# Altium PCB PlacaTestingChipNoviembre.PcbDoc
Units mil, origin at the board's own origin, x right, y up, seen from the top; angles counter-clockwise.
Board outline 3593.99 x 4655.7 mil, 2 copper layers (Top Layer, Bottom Layer); 18 components, 28 nets, 85 pads, 1 vias.
Unrouted connection lines stored in the file: 1.
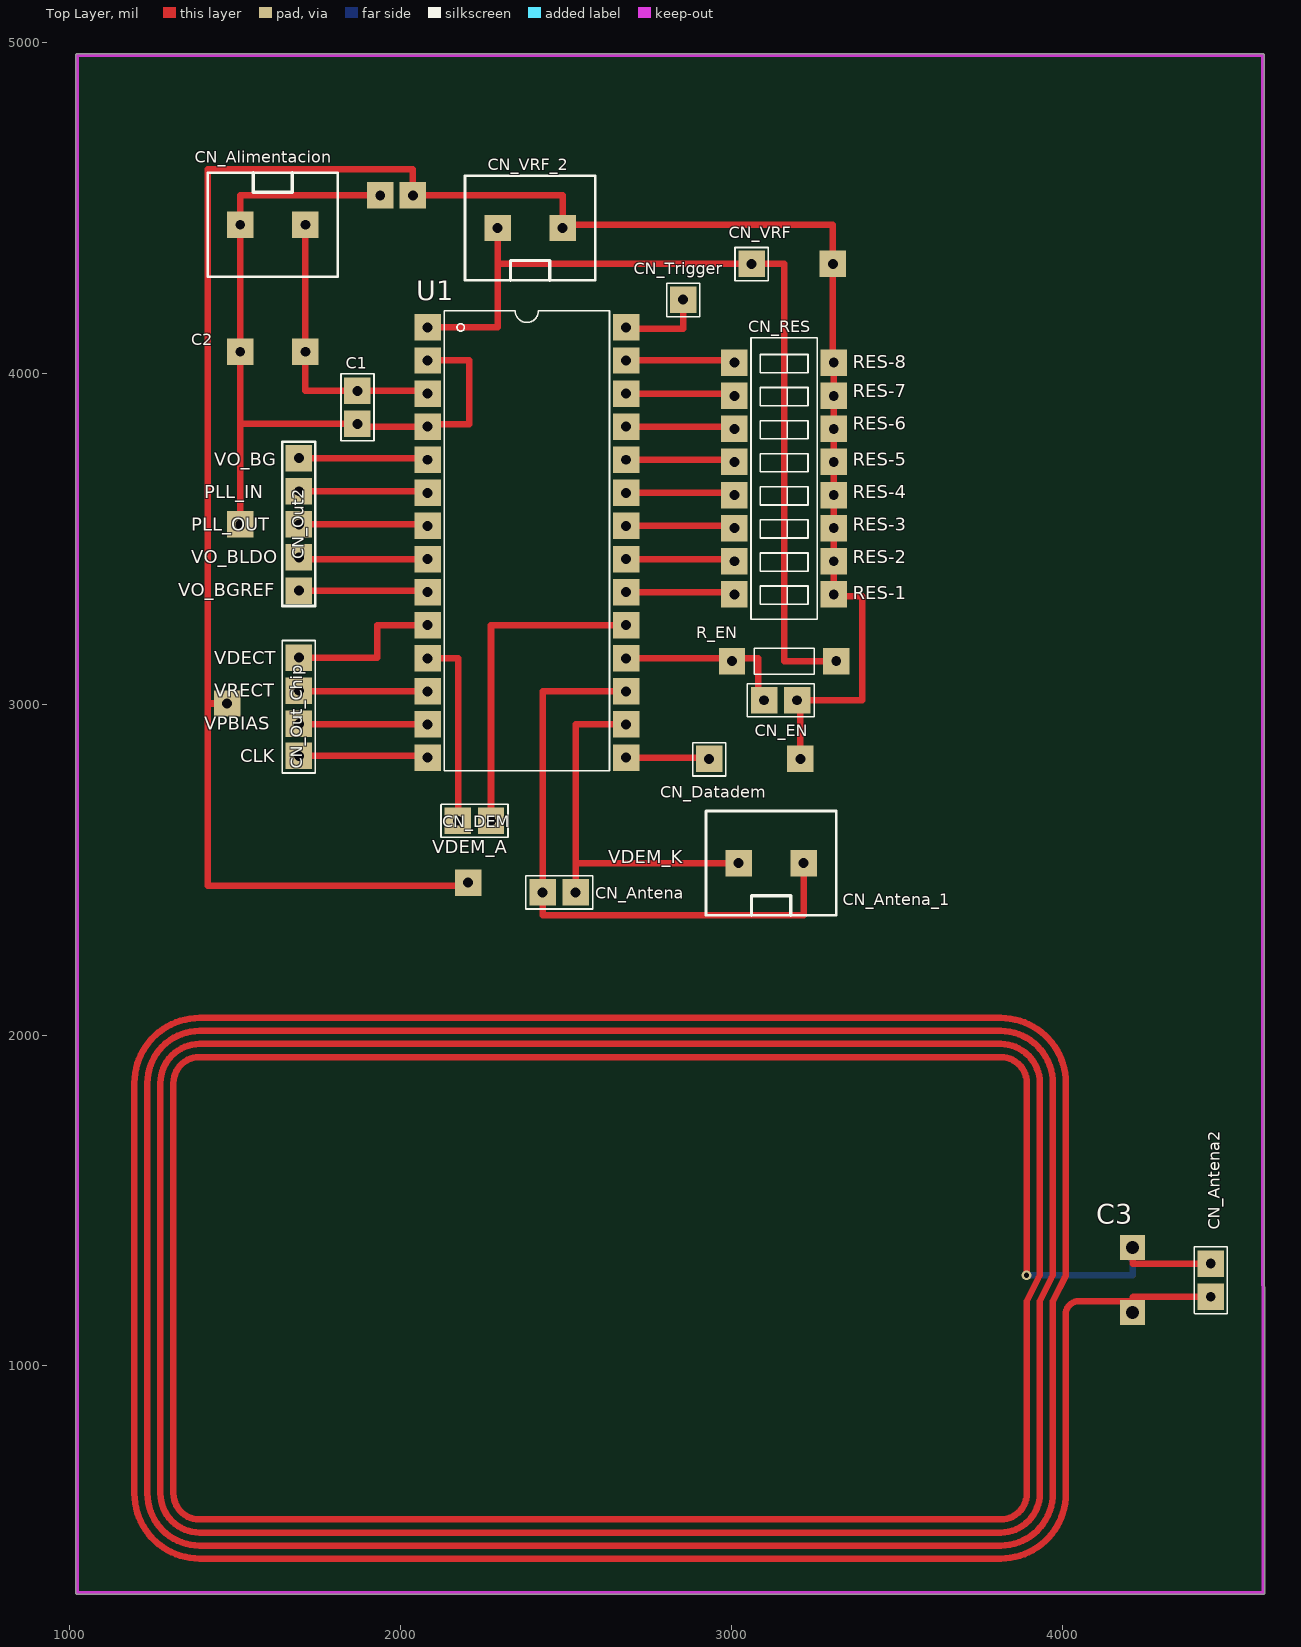
[diagram p0: Top Layer view]
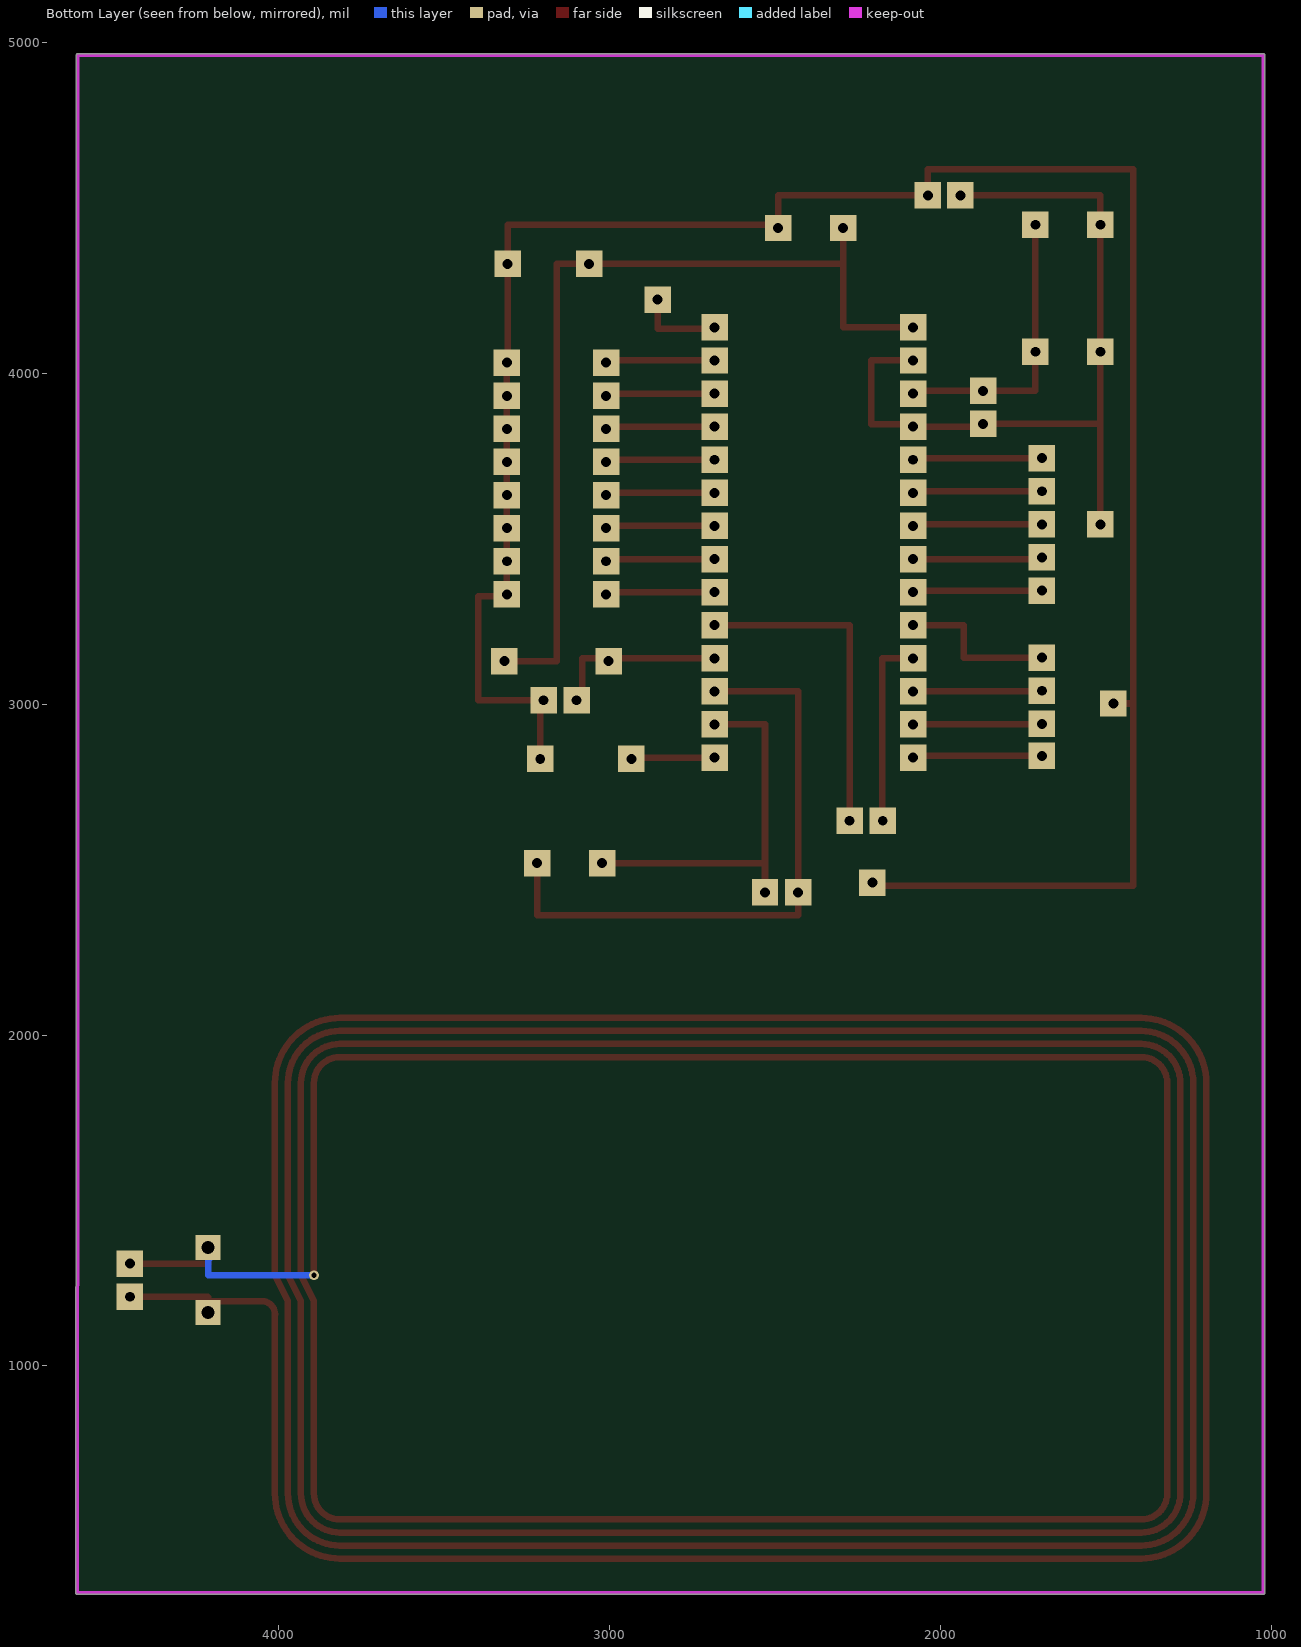
[diagram p1: Bottom Layer view, seen from below]

## Layer stack, top to bottom
Top Solder: solder mask 0.4, Solder Resist, Dk 3.5
Top Layer: signal copper 1.4
Dielectric 1: dielectric 12.6, FR-4, Dk 4.8
Bottom Layer: signal copper 1.4
Bottom Solder: solder mask 0.4, Solder Resist, Dk 3.5

## Board outline
1018.61,314.96 ccw(c1023.62,314.96) 1023.62,309.95 4607.58,309.95 ccw(c4607.58,314.96) 4612.59,314.96 ccw(c4607.58,314.96) 4612.59,314.97 4610.65,2166.53 4610.65,4960.63 ccw(c4605.64,4960.63) 4605.64,4965.65 1023.62,4965.65 ccw(c1023.62,4960.63) 1018.61,4960.63

## Design rules (kind name [scope] priority, off if disabled: settings)
Clearance [All] p1: gap=10
PolygonConnect [All] p1: connectstyle=Relief reliefconductorwidth=10 reliefentries=4 polygonreliefangle="90 Angle" airgapwidth=10
RoutingVias [All] p1: holewidth=28 width=50 viastyle="Through Hole" minholewidth=28 minwidth=50 maxholewidth=28 maxwidth=50
SolderMaskExpansion [All] p1: expansion=4
Width [All] p1: maxlimit=78.74 minlimit=19.68 preferedwidth=39.37 minimp=50.000000 maximp=50.000000 favimp=50.000000
29 further rules are at their usual default settings.

## Components (designator, comment, footprint, x,y, rotation, side; value= is the part's Value field where it differs from the comment)
C1 "100n" "2x1 Pin Array" 1870.08,3946.85 r270 top
C2 "10u" GKGXXX15#1 1614.17,4064.96 r180 top
C3 "GKGXXX15" GKGXXX15#2 4212.6,1259.84 r90 top
CN_Alimentacion "C_2" "2X1 BORNERA" 1614.17,4448.82 r180 top
CN_Antena "C_2" "2X1 PIN ARRAY" 2529.53,2431.1 r180 top
CN_Antena2 "C_2" "2X1 PIN ARRAY" 4448.82,1309.06 r270 top
CN_Antena_1 "C_2" "2X1 BORNERA" 3120.08,2519.68 r0 top
CN_Datadem "C_1" "1x1 Pin Array" 2933.07,2834.65 r90 top
CN_DEM "C_2" "2x1 Pin Array" 2273.62,2647.64 r180 top
CN_EN "C_2" "2X1 PIN ARRAY" 3198.82,3011.81 r180 top
CN_Out2 "C_5" "5x1 Pin Array" 1692.91,3543.31 r270 top
CN_Out_Chip "C_4" "4x1 Pin Array" 1692.91,2992.13 r270 top
CN_RES "C_9-2" PDIP_8 3159.45,3631.89 r180 top
CN_Trigger "C_1" "1x1 Pin Array" 2854.33,4222.44 r90 top
CN_VRF "C_1" "1x1 Pin Array" 3061.02,4330.71 r90 top
CN_VRF_2 "C_2" "2x1 Bornera" 2391.73,4438.98 r0 top
R_EN "1M" R_1/4 3159.45,3129.92 r0 top
U1 "Chip Noviembre" "PDIP_28 - Large" 2381.89,3838.58 r0 top

## Footprints (in the part's own frame and the unit in brackets; to place one, negate y for a bottom-side part, rotate by r counter-clockwise, add the part's x,y. Pads: shape width x height; smd on the part's side, far side on the other; paste and mask are expansions set on the pad)
"1x1 Pin Array" [mil]
  rect 80x80 hole 30: 1(0,0)
  silkscreen extent -52,-50 49,50
"2X1 BORNERA" [mil] "Bornera"
  rect 80x80 hole 30: 1(-98.43,0) 2(98.43,0)
  silkscreen extent -197,-157 197,157
"2x1 Bornera" [mil] "Bornera"
  rect 80x80 hole 30: 1(-98.43,0) 2(98.43,0)
  silkscreen extent -197,-157 197,157
"2x1 Pin Array" [mil]
  rect 80x80 hole 30: 1(0,0) 2(100,0)
  silkscreen extent -52,-50 151,50
"2X1 PIN ARRAY" [mil]
  rect 80x80 hole 30: 1(0,0) 2(100,0)
  silkscreen extent -52,-50 151,50
"4x1 Pin Array" [mil]
  rect 80x80 hole 30: 1(-148.43,0) 2(-48.43,0) 3(51.57,0) 4(148.43,0)
  silkscreen extent -200,-50 200,50
"5x1 Pin Array" [mil] "Tira de pines"
  rect 80x80 hole 30: 1(-200,0) 2(-100,0) 3(0,0) 4(100,0) 5(200,0)
  silkscreen extent -250,-50 247,50
GKGXXX15#1 [mil]
  rect 80x80 hole 30: 1(-98.43,0) 2(98.43,0)
GKGXXX15#2 [mil]
  rect 74.8x74.8 hole 39.37: 1(-98.43,0) 2(98.43,0)
PDIP_8 [mil]
  rect 80x80 hole 30 unplated: 1(-150,300) 2(-150,200) 3(-150,100) 4(-150,0) 5(-150,-100) 6(-150,-200) 7(-150,-300) 8(-150,-400) 9(150,-400) 10(150,-300) 11(150,-200) 12(150,-100) 13(150,0) 14(150,100) 15(150,200) 16(150,300)
  silkscreen extent -100,-475 100,375
"PDIP_28 - Large" [mil]
  rect 80x80 hole 30 unplated: 1(-300,300) 2(-300,200) 3(-300,100) 4(-300,0) 5(-300,-100) 6(-300,-200) 7(-300,-300) 8(-300,-400) 9(-300,-500) 10(-300,-600) 11(-300,-700) 12(-300,-800) 13(-300,-900) 14(-300,-1000) 15(300,-1000) 16(300,-900) 17(300,-800) 18(300,-700) 19(300,-600) 20(300,-500) 21(300,-400) 22(300,-300) 23(300,-200) 24(300,-100) 25(300,0) 26(300,100) 27(300,200) 28(300,300)
  silkscreen extent -250,-1040 250,350
R_1/4 [mil] "Resistencia de 1/4 W"
  rect 80x80 hole 30: 1(-157.48,0) 2(157.48,0)
  silkscreen extent -91,-39 92,39

## Part data
C1 C2: library part Cap, "Capacitor"
CN_Alimentacion CN_Antena CN_Antena2 CN_Antena_1 CN_DEM CN_EN CN_VRF_2: "Conector 2 pines"
CN_Datadem CN_Trigger CN_VRF: "Conector 1 pines"
CN_Out2: "Conector 5 pines"
CN_Out_Chip: "Conector 4 pines"
CN_RES: "Connector 9 pins"
R_EN: library part R, "Chip Resistor"
U1: "UTN 500nm Nativo"

## Free pads (board coordinates)
  rect 80x80 hole 30: 0(1476.38,3001.97) 0(1515.75,3543.31) 0(1938.98,4537.4) 0(2037.4,4537.4) 0(2204.72,2460.63) 0(3208.66,2834.65) 0(3307.09,4330.71)

## Via types
v1: diameter 29.53, hole 15.75, Top Layer to Bottom Layer, 1 vias

## Nets (pads, with @x,y where several pads share a name; then routed paths per layer and width w, separated by ;. In a path a pad name is that pad's centre, name@x,y a point inside that pad or via, vN(x,y) a via of type N, cw(c..) or ccw(c..) an arc to the next point about the centre after c; other vN are vias at no path point)
CLK: CN_Out_Chip.4 U1.14 | length 384.3
  Top Layer w19.68: CN_Out_Chip.4@1692.91,2844.49 2068.82,2844.49 U1.14@2074.72,2838.58
EN: CN_EN.2 R_EN.1 U1.18 | length 533.8
  Top Layer w19.68: U1.18 3081.89,3138.58 3081.89,3028.74 CN_EN.2
GND: C1.2 C2.2 CN_Alimentacion.2 CN_EN.1 CN_RES.1 CN_RES.2 CN_RES.3 CN_RES.4 CN_RES.5 CN_RES.6 CN_RES.7 CN_RES.8 CN_VRF_2.2 pad.0 U1.2 U1.4 | length 9446
  Top Layer w19.68: pad.0@1476.38,3001.97 1417.32,3001.97 ; pad.0@1515.75,3543.31 1515.75,3846.85 ; CN_Alimentacion.2 1515.75,4537.4 pad.0@1938.98,4537.4 ; CN_Alimentacion.2@1515.75,4458.66 C2.2 1515.75,3846.85 ; pad.0@2037.4,4537.4 2037.4,4616.14 1417.32,4616.14 1417.32,3001.97 ; pad.0@2057.09,4537.4 2490.16,4537.4 CN_VRF_2.2@2490.16,4448.82 ; U1.2@2068.03,4045.28 2074.72,4038.58 U1.2@2081.42,4045.28 ; U1.2 2207.87,4038.58 2207.87,3845.28 2088.58,3845.28 U1.4 1878.35,3838.58 C1.2 1515.75,3846.85 ; pad.0@2214.57,2460.63 2204.72,2450.79 1417.32,2450.79 1417.32,3001.97 ; CN_VRF_2.2 CN_VRF_2.2@2490.16,4448.82 ; CN_EN.1 3395.67,3011.81 3395.67,3326.77 3314.57,3326.77 CN_RES.1 CN_RES.2 CN_RES.3 CN_RES.4 CN_RES.5 CN_RES.6 CN_RES.7 3309.45,4015.75 CN_RES.8@3316.93,4023.23 ; pad.0@3208.66,2805.12 CN_EN.1@3208.66,3001.97 ; CN_RES.8 3307.09,4034.25 3307.09,4330.71 3307.09,4448.82 CN_VRF_2.2@2490.16,4448.82
NetC3_0: C3.1 C3.2 CN_Antena2.1 CN_Antena2.2 | length 33897.3
  Top Layer w19.68: v1@3892.72,1279.96 3892.72,1854.84 ccw(c3813.98,1854.84) 3813.98,1933.58 1392.72,1933.58 ccw(c1392.72,1854.84) 1313.98,1854.84 1313.98,614.69 ccw(c1392.72,614.69) 1392.72,535.94 3813.98,535.94 ccw(c3813.98,614.69) 3892.72,614.69 3892.72,1195.39 3932.09,1274.13 3932.09,1854.84 ccw(c3813.98,1854.84) 3813.98,1972.95 1392.72,1972.95 ccw(c1392.72,1854.84) 1274.61,1854.84 1274.61,614.69 ccw(c1392.72,614.69) 1392.72,496.57 3813.98,496.57 ccw(c3813.98,614.69) 3932.09,614.69 3932.09,1195.39 3971.46,1274.13 3971.46,1856.61 ; 3971.46,1854.84 ccw(c3813.98,1854.84) 3813.98,2012.32 1392.72,2012.32 ccw(c1392.72,1854.84) 1235.24,1854.84 1235.24,614.69 ccw(c1392.72,614.69) 1392.72,457.2 3813.98,457.2 ccw(c3813.98,614.69) 3971.46,614.69 3971.46,1195.39 4010.83,1274.13 4010.83,1854.84 ccw(c3813.98,1854.84) 3813.98,2051.69 1392.72,2051.69 ccw(c1392.72,1854.84) 1195.87,1854.84 1195.87,614.69 ccw(c1392.72,614.69) 1392.72,417.83 3813.98,417.83 ccw(c3813.98,614.69) 4010.83,614.69 4010.83,1156.02 ; 4010.24,1156.02 cw(c4049.61,1156.02) 4049.61,1195.39 C3.1@4212.6,1195.39 ; C3.1@4212.6,1141.73 C3.1@4212.6,1195.39 ; C3.2 4212.6,1309.06 4438.98,1309.06 CN_Antena2.1@4448.82,1299.21 ; CN_Antena2.2 4214.17,1209.06 4212.6,1207.48 C3.1@4212.6,1195.39
  Bottom Layer w19.68: v1@3892.72,1274.13 4212.6,1274.13 4212.6,1319.41 4193.17,1338.84 C3.2
  other v1: 3892.13,1274.13
NetCN_Trigger_1: CN_Trigger.1 U1.28 | length 263
  Top Layer w19.68: U1.28 2686.61,4133.86 2854.33,4133.86 CN_Trigger.1
PLL-IN: CN_Out2.2 U1.6 | length 364.2
  Top Layer w19.68: CN_Out2.2@1702.76,3643.31 U1.6@2059.76,3643.31 ; U1.6@2069.61,3633.46 U1.6@2074.72,3638.58
PLL-OUT: CN_Out2.3 U1.7 | length 367.2
  Top Layer w19.68: CN_Out2.3@1702.76,3543.31 U1.7@2070,3543.31
RES-1: CN_RES.16 U1.20 | length 320.9
  Top Layer w19.68: U1.20 CN_RES.16@3002.76,3338.58
RES-2: CN_RES.15 U1.21 | length 320.9
  Top Layer w19.68: U1.21 CN_RES.15@3002.76,3438.58
RES-3: CN_RES.14 U1.22 | length 320.9
  Top Layer w19.68: U1.22 CN_RES.14@3002.76,3538.58
RES-4: CN_RES.13 U1.23 | length 320.9
  Top Layer w19.68: U1.23 CN_RES.13@3002.76,3638.58
RES-5: CN_RES.12 U1.24 | length 320.9
  Top Layer w19.68: U1.24 CN_RES.12@3002.76,3738.58
RES-6: CN_RES.11 U1.25 | length 320.9
  Top Layer w19.68: U1.25 CN_RES.11@3002.76,3838.58
RES-7: CN_RES.10 U1.26 | length 320.9
  Top Layer w19.68: U1.26 CN_RES.10@3002.76,3938.58
RES-8: CN_RES.9 U1.27 | length 320.9
  Top Layer w19.68: U1.27 CN_RES.9@3002.76,4038.58
RF+: CN_Antena.1 CN_Antena_1.1 U1.16 | length 1158.8
  Top Layer w19.68: CN_Antena.1 2529.53,2519.68 ; U1.16@2688.69,2938.58 U1.16 2529.53,2938.58 2529.53,2519.68 ; CN_Antena_1.1 2529.53,2519.69
RF-: CN_Antena.2 CN_Antena_1.2 U1.17 | length 1875.2
  Top Layer w19.68: U1.17 2429.53,3038.58 CN_Antena.2 2429.53,2362.2 3218.5,2362.2 CN_Antena_1.2
VCC: C1.1 C2.1 CN_Alimentacion.1 U1.3 | length 877.4
  Top Layer w19.68: CN_Alimentacion.1@1712.6,4458.66 1712.6,3946.85 C1.1 2066.46,3946.85 U1.3@2074.72,3938.58
VCC_RF: CN_VRF.1 CN_VRF_2.1 R_EN.2 U1.1 | length 2841.8
  Top Layer w19.68: U1.1@2074.72,4138.58 2293.31,4138.58 CN_VRF_2.1 2293.31,4330.71 3159.45,4330.71 3159.45,3129.92 R_EN.2@3307.09,3129.92
VDATA: CN_Datadem.1 U1.15 | length 284.6
  Top Layer w19.68: U1.15 2933.07,2838.58 CN_Datadem.1@2933.07,2805.12
VDECT: CN_Out_Chip.1 U1.10 | length 480.4
  Top Layer w19.68: CN_Out_Chip.1@1692.91,3139.76 1929.13,3139.76 1929.13,3238.19 1929.53,3238.58 U1.10@2074.72,3238.58
VDEM_A: CN_DEM.2 U1.11 | length 584.3
  Top Layer w19.68: U1.11 2175.2,3138.58 CN_DEM.2@2175.2,2647.64
VDEM_K: CN_DEM.1 U1.19 | length 999.2
  Top Layer w19.68: CN_DEM.1 2273.62,3238.58 U1.19
VO_BG: CN_Out2.1 U1.5 | length 367.2
  Top Layer w19.68: CN_Out2.1@1702.76,3743.31 U1.5@2070,3743.31
VO_BGREF: CN_Out2.5 U1.9 | length 357
  Top Layer w19.68: CN_Out2.5@1702.76,3343.31 U1.9@2059.76,3343.31
VO_BLDO: CN_Out2.4 U1.8 | length 374.5
  Top Layer w19.68: CN_Out2.4@1707.48,3438.58 2074.72,3438.58 U1.8@2069.61,3433.46
VPBIAS: CN_Out_Chip.3 U1.13 | length 381.8
  Top Layer w19.68: CN_Out_Chip.3@1692.91,2938.58 U1.13@2074.72,2938.58
VRECT: CN_Out_Chip.2 U1.12 | length 381.8
  Top Layer w19.68: CN_Out_Chip.2@1692.91,3038.58 U1.12@2074.72,3038.58

## Keep-outs
Keep-Out Layer:
  lines w10: 1023.62,2401.57 1023.62,314.96 4607.58,314.96 4605.64,2166.52 4605.64,4960.63 1023.62,4960.63 1023.62,2401.57 ; 1023.62,2401.57 1023.62,2401.57

## Silkscreen, mask and mechanical layers (free items; w line width, h text height)
Top Overlay:
  text "RES-8" at 3366.14,4015.75 h40
  text "RES-7" at 3366.14,3927.17 h40
  text "RES-6" at 3366.14,3828.74 h40
  text "VO_BG" at 1437.01,3720.47 h40
  text "RES-5" at 3366.14,3720.47 h40
  text "PLL_IN" at 1407.48,3622.05 h40
  text "RES-4" at 3366.14,3622.05 h40
  text "PLL_OUT" at 1368.11,3523.62 h40
  text "RES-3" at 3366.14,3523.62 h40
  text "VO_BLDO" at 1368.11,3425.2 h40
  text "RES-2" at 3366.14,3425.2 h40
  text "VO_BGREF" at 1328.74,3326.77 h40
  text "RES-1" at 3366.14,3316.93 h40
  text "VDECT" at 1437.01,3120.08 h40
  text "VRECT" at 1437.01,3021.65 h40
  text "VPBIAS" at 1407.48,2923.23 h40
  text "CLK" at 1515.75,2824.8 h40
  text "VDEM_A" at 2096.46,2549.21 h40
  text "VDEM_K" at 2627.95,2519.68 h40
Mechanical 1:
  lines w10: 1102.36,2283.46 4527.56,2283.46 ; 1771.65,2125.98 1102.36,2125.98 1102.36,4921.26 4527.56,4921.26 4527.56,2125.98 1062.99,2125.98 1062.99,354.33 4527.56,354.33 4527.56,2362.2

## Dimensions
1195.87,614.69 to 4010.83,614.69 on Top Overlay
4527.56,2283.46 to 4527.56,4921.26 on Top Overlay
4527.56,2125.98 to 4527.56,354.33 on Top Overlay
3444.88,4744.09 to 1368.11,4685.04 on Top Overlay